# Altium PCB PCB1.PcbDoc
Units mil, origin at the board's own origin, x right, y up, seen from the top; angles counter-clockwise.
Board outline 2465 x 860 mil, 2 copper layers (Top Layer, Bottom Layer); 32 components, 23 nets, 85 pads, 0 vias.
Unrouted connection lines stored in the file: 1.
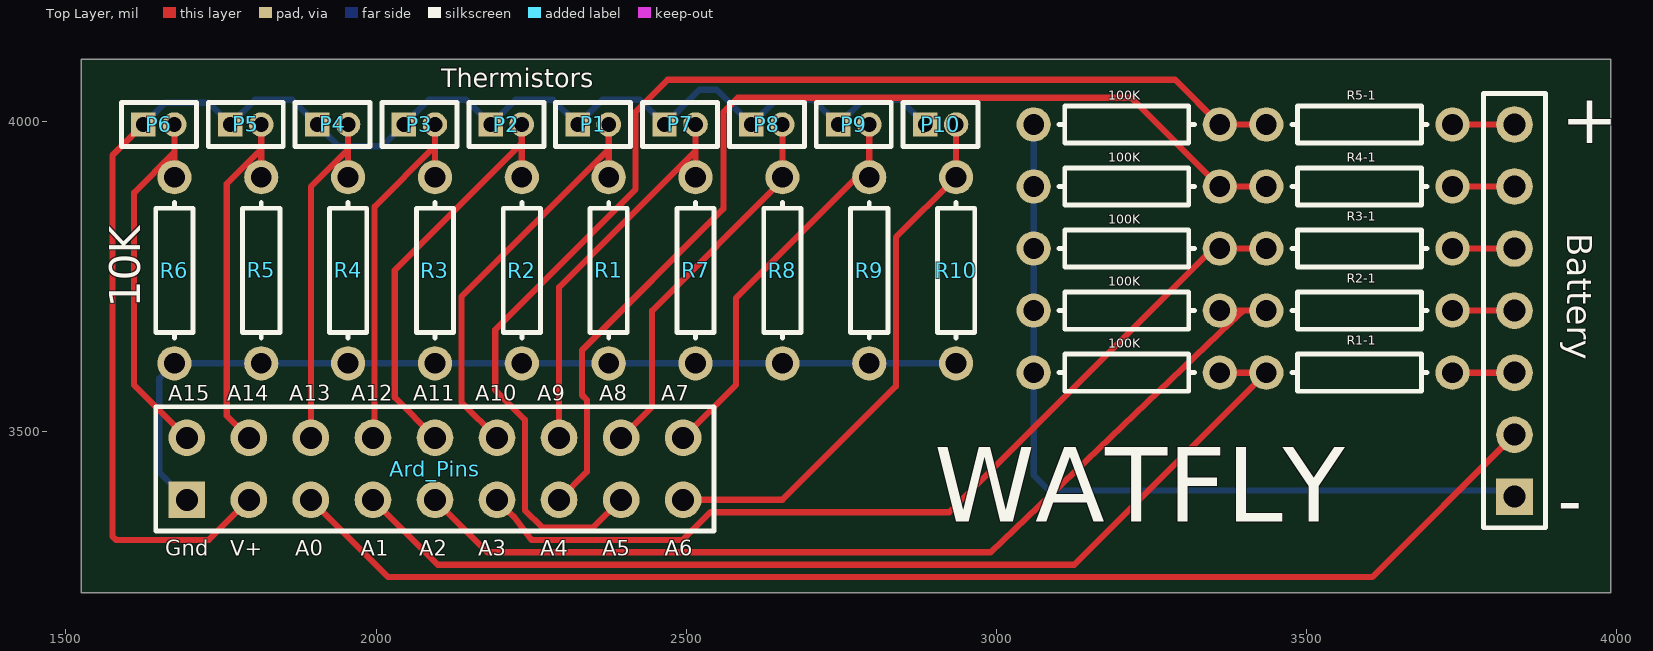
[diagram p0: Top Layer view]
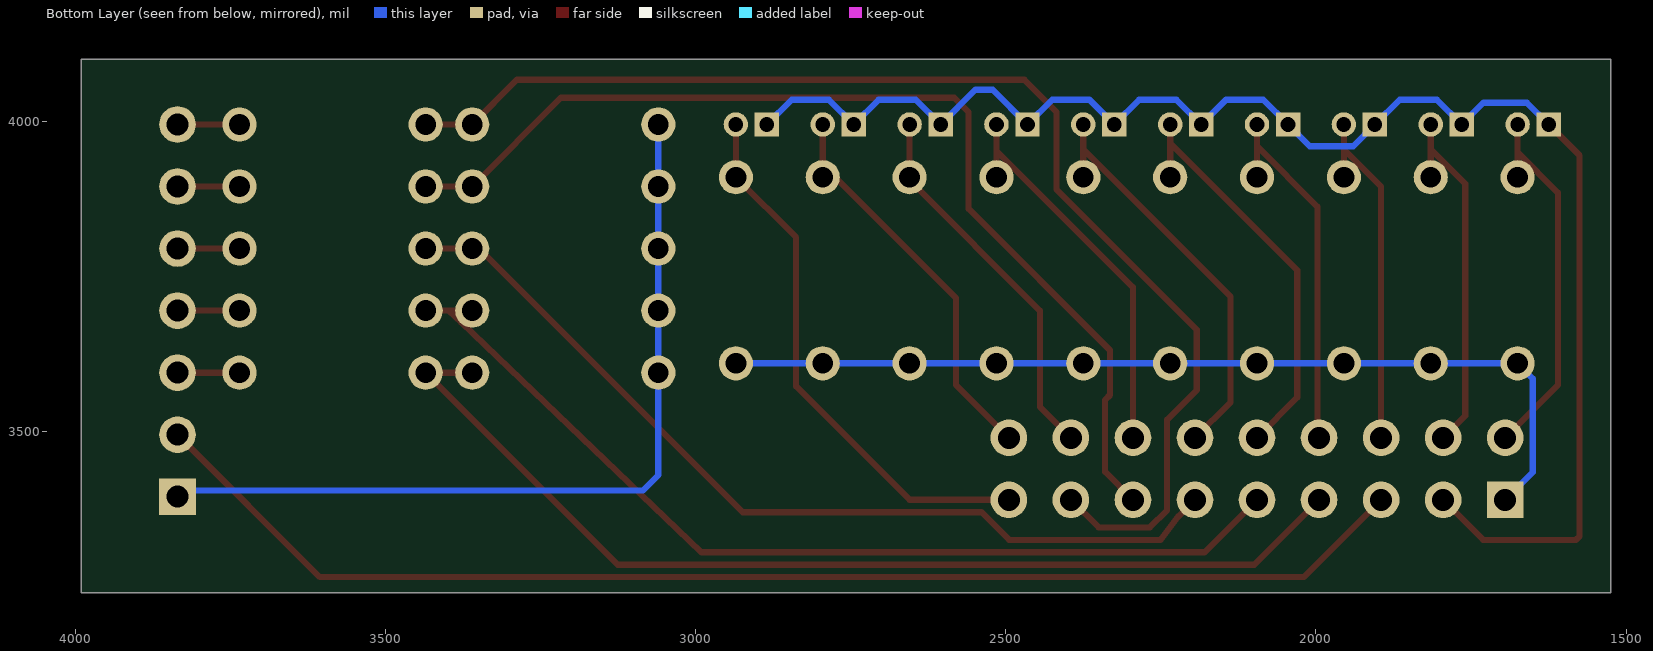
[diagram p1: Bottom Layer view, seen from below]

## Layer stack, top to bottom
Top Solder: solder mask 0.4, Solder Resist, Dk 3.5
Top Layer: signal copper 1.4
Dielectric 1: dielectric 12.6, FR-4, Dk 4.8
Bottom Layer: signal copper 1.4
Bottom Solder: solder mask 0.4, Solder Resist, Dk 3.5

## Board outline
1525,3240 1525,4100 3990,4100 3990,3240

## Design rules (kind name [scope] priority, off if disabled: settings)
Clearance Clearance_1 [All] p1: gap=10 ignorepadtopadclearanceinfootprint=FALSE except(0: Arc-Hole Track-Hole SMDPad-Hole THPad-Hole Via-Hole Fill-Hole Poly-Hole Region-Hole Text-Hole)
Clearance [All] p2: gap=10 ignorepadtopadclearanceinfootprint=FALSE except(0: Arc-Hole Track-Hole SMDPad-Hole THPad-Hole Via-Hole Fill-Hole Poly-Hole Region-Hole Text-Hole)
PolygonConnect [All] p1: connectstyle=Relief reliefconductorwidth=10 reliefentries=4 polygonreliefangle="90 Angle" airgapwidth=10
RoutingVias [All] p1: holewidth=28 width=50 viastyle="Through Hole" minholewidth=28 minwidth=50 maxholewidth=28 maxwidth=50
SolderMaskExpansion [All] p1: expansion=4
Width [All] p1: maxlimit=10 minlimit=10 preferedwidth=10
30 further rules are at their usual default settings.

## Classes and differential pairs
component class Prototype_PCB: 100K Ard_Pins Battery P1 P2 P3 P4 P5 P6 P7 P8 P9 P10 R1 R1-1 R2 R2-1 R3 R3-1 R4 R4-1 R5 R5-1 R6 R7 R8 R9 R10

## Components (designator, comment, footprint, x,y, rotation, side; value= is the part's Value field where it differs from the comment)
100K "Res1" AXIAL-0.3 3210,3995 r0 top value=100K (schematic designator R5-2)
100K "Res1" AXIAL-0.3 3210,3895 r0 top value=100K (schematic designator R4-2)
100K "Res1" AXIAL-0.3 3210,3795 r0 top value=100K (schematic designator R3-2)
100K "Res1" AXIAL-0.3 3210,3695 r0 top value=100K (schematic designator R2-2)
100K "Res1" AXIAL-0.3 3210,3595 r0 top value=100K (schematic designator R1-2)
Ard_Pins "Header 9X2" HDR2X9 1695,3390 r0 top
Battery "1" HDR1X7 3835,3395 r90 top
P1 "MHDR1X2" MHDR1X2 2325,3995 r0 top
P2 "MHDR1X2" MHDR1X2 2185,3995 r0 top
P3 "MHDR1X2" MHDR1X2 2045,3995 r0 top
P4 "MHDR1X2" MHDR1X2 1905,3995 r0 top
P5 "MHDR1X2" MHDR1X2 1765,3995 r0 top
P6 "MHDR1X2" MHDR1X2 1625,3995 r0 top
P7 "MHDR1X2" MHDR1X2 2465,3995 r0 top
P8 "MHDR1X2" MHDR1X2 2605,3995 r0 top
P9 "MHDR1X2" MHDR1X2 2745,3995 r0 top
P10 "MHDR1X2" MHDR1X2 2885,3995 r0 top
R1 "Res1" AXIAL-0.3 2375,3760 r270 top value=10K
R1-1 "Res1" AXIAL-0.3 3585,3595 r0 top value=>=68K
R2 "Res1" AXIAL-0.3 2235,3760 r270 top value=10K
R2-1 "Res1" AXIAL-0.3 3585,3695 r0 top value=>=152K
R3 "Res1" AXIAL-0.3 2095,3760 r270 top value=10K
R3-1 "Res1" AXIAL-0.3 3585,3795 r0 top value=>=236K
R4 "Res1" AXIAL-0.3 1955,3760 r270 top value=10K
R4-1 "Res1" AXIAL-0.3 3585,3895 r0 top value=>=320K
R5 "Res1" AXIAL-0.3 1815,3760 r270 top value=10K
R5-1 "Res1" AXIAL-0.3 3585,3995 r0 top value=">=404 K"
R6 "Res1" AXIAL-0.3 1675,3760 r270 top value=10K
R7 "Res1" AXIAL-0.3 2515,3760 r270 top value=10K
R8 "Res1" AXIAL-0.3 2655,3760 r270 top value=10K
R9 "Res1" AXIAL-0.3 2795,3760 r270 top value=10K
R10 "Res1" AXIAL-0.3 2935,3760 r270 top value=10K

## Footprints (in the part's own frame and the unit in brackets; to place one, negate y for a bottom-side part, rotate by r counter-clockwise, add the part's x,y. Pads: shape width x height; smd on the part's side, far side on the other; paste and mask are expansions set on the pad)
AXIAL-0.3 [mm] "Axial Device, Thru-Hole; 2 Leads; 0.3 in Pin Spacing"
  round 1.4 hole 0.85: 1(-3.81,0) 2(3.81,0)
  silkscreen extent -2.77,-0.76 2.77,0.76
HDR1X7 [mm] "Connector; Header; 7 Position"
  rect 1.5x1.5 hole 0.9: 1(0,0)
  round 1.5 hole 0.9: 2(2.54,0) 3(5.08,0) 4(7.62,0) 5(10.16,0) 6(12.7,0) 7(15.24,0)
  silkscreen extent -1.27,-1.27 16.51,1.27
HDR2X9 [mm] "Connector; Header; 9x2 Position"
  rect 1.5x1.5 hole 0.9: 1(0,0)
  round 1.5 hole 0.9: 2(0,2.54) 3(2.54,0) 4(2.54,2.54) 5(5.08,0) 6(5.08,2.54) 7(7.62,0) 8(7.62,2.54) 9(10.16,0) 10(10.16,2.54) 11(12.7,0) 12(12.7,2.54) 13(15.24,0) 14(15.24,2.54) 15(17.78,0) 16(17.78,2.54) 17(20.32,0) 18(20.32,2.54)
  silkscreen extent -1.27,-1.27 21.59,3.81
MHDR1X2 [mm] "Connector; Header; 2 Position"
  rect 1x1 hole 0.6: 1(0,0)
  round 1 hole 0.6: 2(1.27,0)
  silkscreen extent -0.9,-0.9 2.17,0.9

## Part data
100K 100K 100K 100K 100K R1 R1-1 R2 R2-1 R3 R3-1 R4 R4-1 R5 R5-1 R6 R7 R8 R9 R10: "Resistor", LatestRevisionDate=17-Jul-2002, LatestRevisionNote="Re-released for DXP Platform.", PackageDescription="Axial Device, Thru-Hole; 2 Leads; 0.3 in Pin Spacing", PackageReference=AXIAL-0.3, Published=8-Jun-2000, Publisher="Altium Limited"
Ard_Pins: "Header, 9-Pin, Dual row", LatestRevisionDate=17-Jul-2002, LatestRevisionNote="Re-released for DXP Platform.", Publisher="Altium Limited"
Battery: library part "Header 7", "Header, 7-Pin", LatestRevisionDate=17-Jul-2002, LatestRevisionNote="Re-released for DXP Platform.", Publisher="Altium Limited"
P1 P2 P3 P4 P5 P6 P7 P8 P9 P10: "Header, 2-Pin", LatestRevisionDate=17-Jul-2002, LatestRevisionNote="Re-released for DXP Platform.", Publisher="Altium Limited"

## Nets (pads, with @x,y where several pads share a name; then routed paths per layer and width w, separated by ;. In a path a pad name is that pad's centre, name@x,y a point inside that pad or via, vN(x,y) a via of type N, cw(c..) or ccw(c..) an arc to the next point about the centre after c; other vN are vias at no path point)
+5: Ard_Pins.3 P1.1 P2.1 P3.1 P4.1 P5.1 P6.1 P7.1 P8.1 P9.1 P10.1 | length 2496.7
  Top Layer w10: P6.1 1575,3945 1575,3331.33 1580.86,3325.47 1730.47,3325.47 Ard_Pins.3
  Bottom Layer w10: P6.1 1660,4030 1730,4030 P5.1 1805,4035 1865,4035 P4.1 1940,3960 2010,3960 P3.1 2085,4035 2145,4035 P2.1 2225,4035 2285,4035 P1.1 2365,4035 2425,4035 P7.1 2521,4051 2549,4051 P8.1 2645,4035 2705,4035 P9.1 2785,4035 2845,4035 P10.1
GND: 100K.1 Ard_Pins.1 Battery.1 R1.2 R2.2 R3.2 R4.2 R5.2 R6.2 R7.2 R8.2 R9.2 R10.2 | length 2863.1
  Bottom Layer w10: Ard_Pins.1 1650.47,3434.53 1650.47,3508.44 1650.47,3585.47 R6.2 R5.2 R4.2 R3.2 R2.2 R1.2 R7.2 R8.2 R9.2 R10.2 ; 100K.1@3060,3995 3060,3895 3060,3795 3060,3695 3060,3595 3060,3430 3085,3405 3250,3405 3825,3405 Battery.1
NetArd_Pins_2: Ard_Pins.2 P6.2 R6.1 | length 607.1
  Top Layer w10: R6.1 1675,3950 ; P6.2 1675,3950 ; Ard_Pins.2 1610,3575 1610,3885 1675,3950
NetArd_Pins_4: Ard_Pins.4 P5.2 R5.1 | length 587.7
  Top Layer w10: Ard_Pins.4 1759.53,3525.47 1759.53,3899.53 1815,3955 ; R5.1 1815,3955 ; P5.2 1815,3955
NetArd_Pins_5: Ard_Pins.5 Battery.2 | length 2086.7
  Top Layer w10: Ard_Pins.5 2019.53,3265.47 3605.47,3265.47 Battery.2
NetArd_Pins_6: Ard_Pins.6 P4.2 R4.1 | length 574.9
  Top Layer w10: Ard_Pins.6 1895,3895 1955,3955 ; R4.1 1955,3955 ; P4.2 1955,3955
NetArd_Pins_7: 100K.2@3360,3595 Ard_Pins.7 R1-1.1 | length 1686.5
  Top Layer w10: Ard_Pins.7 2099.53,3285.47 3125.47,3285.47 R1-1.1 100K.2@3360,3595
NetArd_Pins_8: Ard_Pins.8 P3.2 R3.1 | length 596.4
  Top Layer w10: Ard_Pins.8 1997.56,3492.56 1997.56,3862.56 2095,3960 ; R3.1 2095,3960 ; P3.2 2095,3960
NetArd_Pins_9: 100K.2@3360,3695 Ard_Pins.9 R2-1.1 | length 1568.9
  Top Layer w10: Ard_Pins.9 2179.53,3305.47 2990.47,3305.47 3377.93,3676.27 3397.5,3695 ; 100K.2@3360,3695 3397.5,3695 ; R2-1.1 3397.5,3695
NetArd_Pins_10: Ard_Pins.10 P2.2 R2.1 | length 671.8
  Top Layer w10: Ard_Pins.10 2030,3555 2030,3760 2235,3965 ; R2.1 2235,3965 ; P2.2 2235,3965
NetArd_Pins_11: 100K.2@3360,3795 Ard_Pins.11 R3-1.1 | length 1464.1
  Top Layer w10: Ard_Pins.11 2221.4,3363.6 2250.93,3325.47 2494.47,3325.47 2539,3370 2924,3370 3349,3795 3360,3795 R3-1.1
NetArd_Pins_12: Ard_Pins.12 P1.2 R1.1 | length 672.1
  Top Layer w10: Ard_Pins.12 2137.56,3547.44 2137.56,3717.56 2375,3955 ; R1.1 2375,3955 ; P1.2 2375,3955
NetArd_Pins_13: 100K.2@3360,3895 Ard_Pins.13 R4-1.1 | length 1685.2
  Top Layer w10: Ard_Pins.13 2340,3435 2340,3551 2332,3559 2332,3631 2560,3859 2560,4015 2583,4038 3217,4038 3360,3895 R4-1.1
NetArd_Pins_14: Ard_Pins.14 P7.2 R7.1 | length 638.6
  Top Layer w10: Ard_Pins.14 2295,3732.5 2515,3952.5 ; R7.1 2515,3952.5 ; P7.2 2515,3952.5
NetArd_Pins_15: 100K.2@3360,3995 Ard_Pins.15 R5-1.1 | length 2008.7
  Top Layer w10: Ard_Pins.15 2350.47,3345.47 2267.53,3345.47 2240,3373 2240,3519 2192,3567 2192,3664 2418,3890 2418,4015 2470,4067 3288,4067 3360,3995 R5-1.1
NetArd_Pins_16: Ard_Pins.16 P8.2 R8.1 | length 612.7
  Top Layer w10: Ard_Pins.16 2445,3540 2445,3695 2655,3905 R8.1 2655,3960 P8.2
NetArd_Pins_17: Ard_Pins.17 P10.2 R10.1 | length 881
  Top Layer w10: Ard_Pins.17 2655,3390 2838,3573 2838,3813 R10.1 P10.2
NetArd_Pins_18: Ard_Pins.18 P9.2 R9.1 | length 649.3
  Top Layer w10: Ard_Pins.18 2580,3575 2580,3715 R9.1@2795,3930 ; R9.1 R9.1@2795,3930 ; P9.2 R9.1@2795,3930
NetBattery_3: Battery.3 R1-1.2 | length 100
  Top Layer w10: R1-1.2 Battery.3
NetBattery_4: Battery.4 R2-1.2 | length 100
  Top Layer w10: R2-1.2 Battery.4
NetBattery_5: Battery.5 R3-1.2 | length 100
  Top Layer w10: R3-1.2 Battery.5
NetBattery_6: Battery.6 R4-1.2 | length 100
  Top Layer w10: R4-1.2 Battery.6
NetBattery_7: Battery.7 R5-1.2 | length 100
  Top Layer w10: R5-1.2 Battery.7

## Silkscreen, mask and mechanical layers (free items; w line width, h text height)
Top Overlay:
  text "Thermistors" at 2105,4055 h30
  text "+" at 3910,3965 h80
  text "10K" at 1620,3700 h50 r90
  text "A15" at 1665,3550 h25
  text "A14" at 1760,3550 h25
  text "A13" at 1860,3550 h25
  text "A12" at 1960,3550 h25
  text "A11" at 2060,3550 h25
  text "A10" at 2160,3550 h25
  text "A9" at 2260,3550 h25
  text "A8" at 2360,3550 h25
  text "A7" at 2460,3550 h25
  text "WATFLY" at 2900,3355 h120
  text "-" at 3905,3350 h80
  text "Gnd" at 1660,3300 h25
  text "V+" at 1765,3300 h25
  text "A0" at 1870,3300 h25
  text "A1" at 1975,3300 h25
  text "A2" at 2070,3300 h25
  text "A3" at 2165,3300 h25
  text "A4" at 2265,3300 h25
  text "A5" at 2365,3300 h25
  text "A6" at 2465,3300 h25
Mechanical 1:
  the board outline again, w10